# Altium PCB PCB_Master_Screen_V2.01.PcbDoc
Units mm, origin at the board's own origin, x right, y up, seen from the top; angles counter-clockwise.
Board outline 116.97 x 59.18 mm, 2 copper layers (Top Layer, Bottom Layer), stack 1.571 mm thick; 51 components, 38 nets, 228 pads, 210 vias.
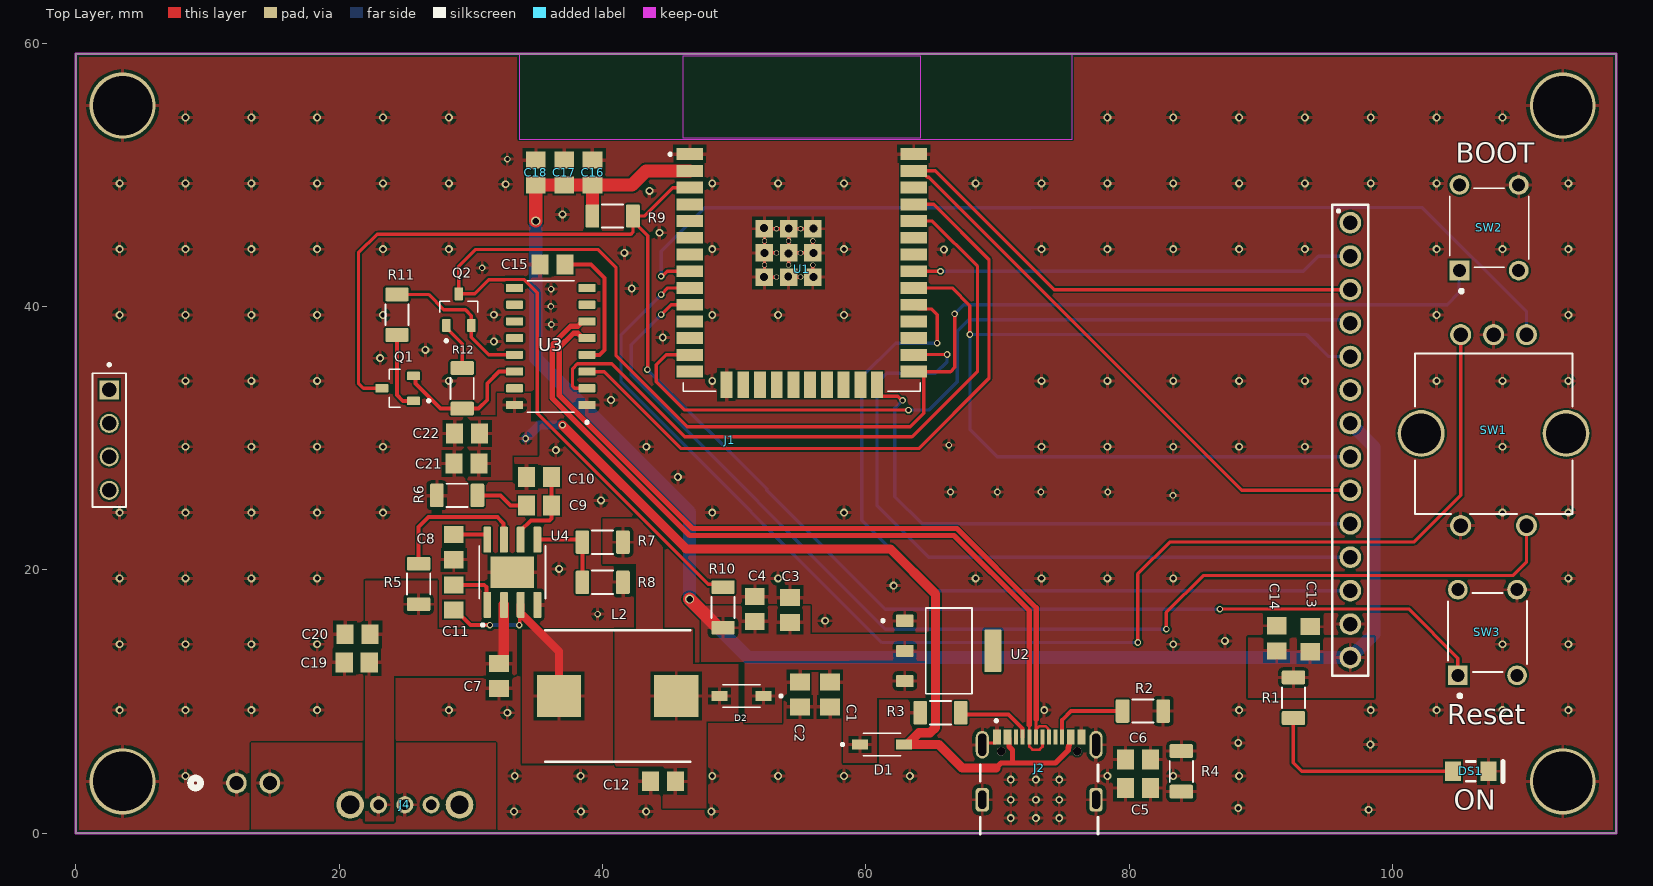
[diagram p0: Top Layer view]
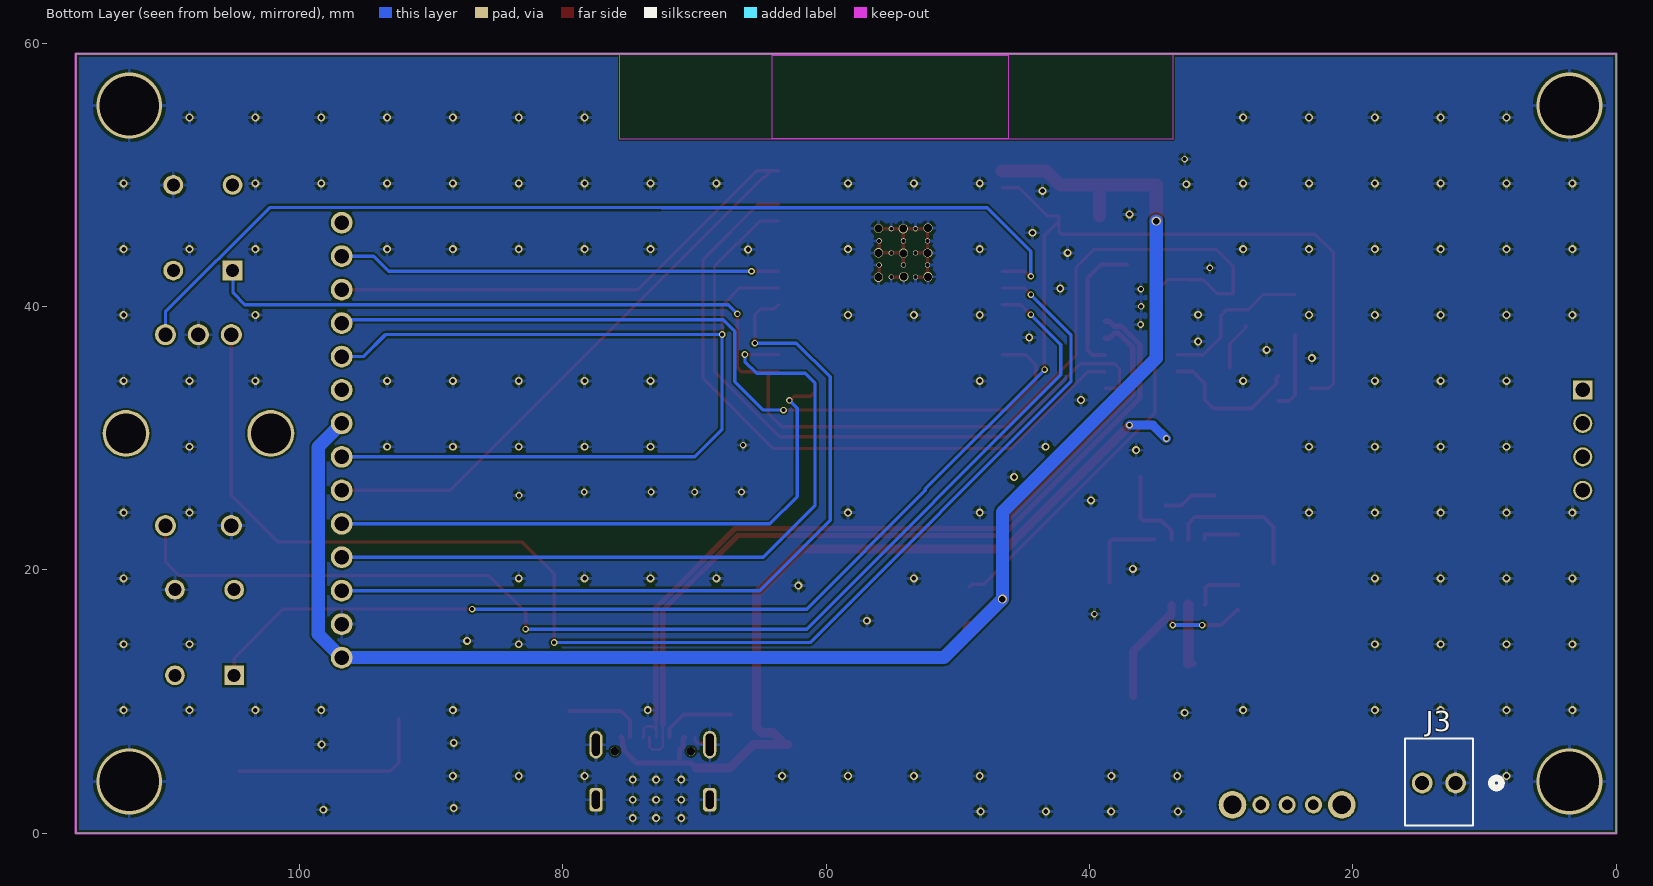
[diagram p1: Bottom Layer view, seen from below]
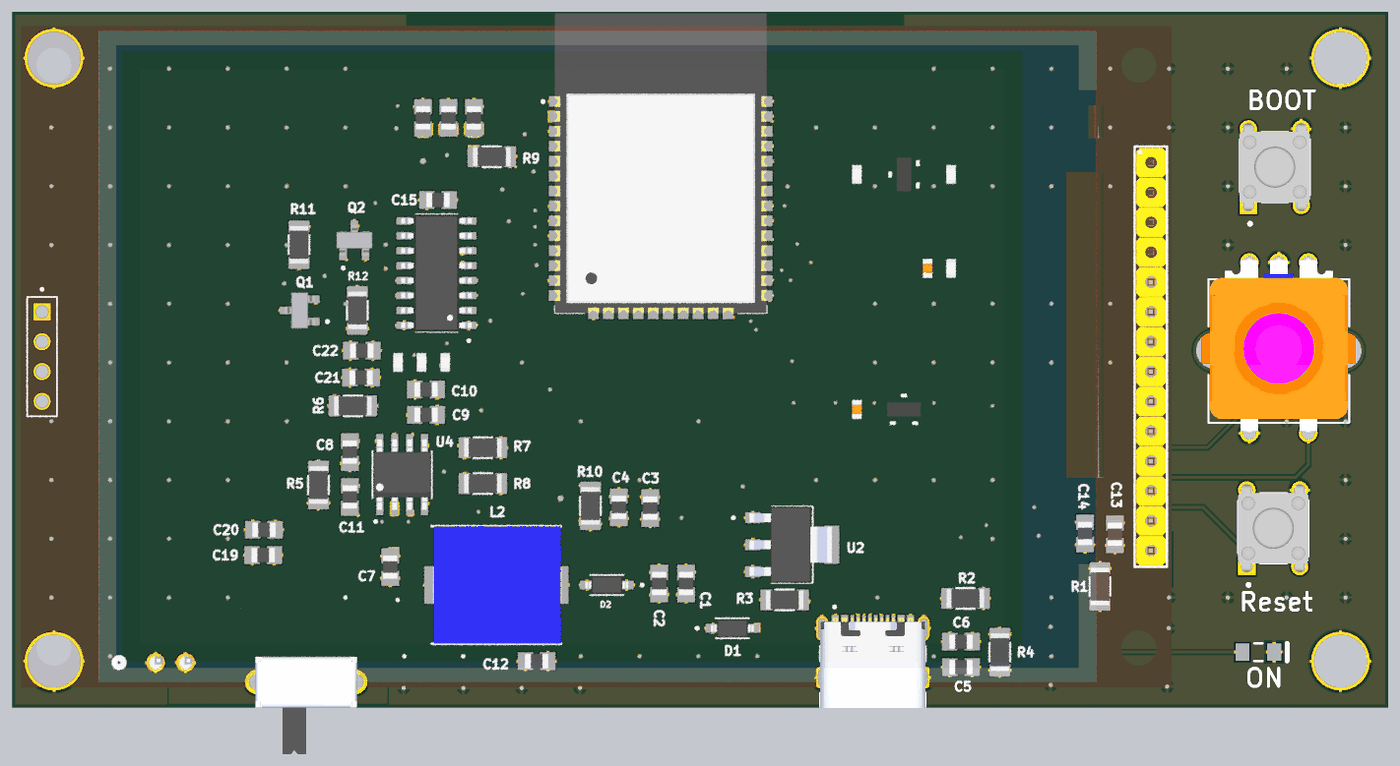
[diagram p2: 3D render of the assembled board from above, using the file's embedded part models]

## Layer stack, top to bottom
Top Solder: solder mask 0.0102, Solder Resist, Dk 3.5
Top Layer: signal copper 0.0356
Dielectric 1: dielectric 1.5, FR-4, Dk 4.8
Bottom Layer: signal copper 0.0356
Bottom Solder: solder mask 0.0102, Solder Resist, Dk 3.5

## Board outline
0,0 116.967,0 116.967,59.182 0,59.182

## Design rules (kind name [scope] priority, off if disabled: settings)
Clearance Clearance_Difpair [InNetClass('USBC')] p1: gap=0.1 ignorepadtopadclearanceinfootprint=FALSE
Clearance Clearance_USBC [InComponent('J2')] p2: gap=0.15 ignorepadtopadclearanceinfootprint=FALSE
Clearance [All] p3: gap=0.15 ignorepadtopadclearanceinfootprint=FALSE
DiffPairsRouting [InDifferentialPairClass('USB_TypeC')] p1: maxlimit=0.127 minlimit=0.127 mostfreqgap=0.127 toplayer_minwidth=0.404 toplayer_maxwidth=0.404 toplayer_prefwidth=0.404 bottomlayer_minwidth=0.404 bottomlayer_maxwidth=0.404 bottomlayer_prefwidth=0.404 impedanceprofiledriven=TRUE impedanceprofileid={651910EB-9BAB-48E1-8D11-BE1311B63662} impedanceprofilevalue=90.000000 maxuncoupledlength=12.7
HoleSize [All] p1: absolutevalues=TRUE maxlimit=6.3 minlimit=0.3 maxpercent=80.000 minpercent=20.000
MinimumSolderMaskSliver [InComponent('U4')] p1: minsoldermaskwidth=0.05
MinimumSolderMaskSliver MinimumSolderMaskSliver_1 [All] p2: minsoldermaskwidth=0.1
PolygonConnect [All] p1: connectstyle=Relief reliefconductorwidth=0.254 reliefentries=4 polygonreliefangle="90 Angle" airgapwidth=0.254
ReturnPath [All] p1: impedanceprofileid={651910EB-9BAB-48E1-8D11-BE1311B63662} _gaplimit=0
RoutingVias [All] p1: holewidth=0.3 width=0.5 viastyle="Through Hole" minholewidth=0.3 minwidth=0.4 maxholewidth=6.3 maxwidth=7
SilkToSolderMaskClearance SilkToSolderMaskClearance_R [HasFootprint('RES1206')] p1: minsilkscreentomaskgap=0.05 clearancetoexposedcopper=TRUE
SilkToSolderMaskClearance [IsPad] p2: minsilkscreentomaskgap=0.2 clearancetoexposedcopper=TRUE
SolderMaskExpansion [All] p1: expansion=0.102 istentingtop=FALSE
SupplyNets "Schematic Supply Nets_4" [InNet('VIN')] p1: voltage=0.000
SupplyNets "Schematic Supply Nets_3" [InNet('5V0')] p2: voltage=0.000
SupplyNets "Schematic Supply Nets_2" [InNet('VBAT')] p3: voltage=0.000
SupplyNets "Schematic Supply Nets_1" [InNet('GND')] p4: voltage=0.000
SupplyNets "Schematic Supply Nets" [InNet('3V3')] p5: voltage=0.000
Width Width_USB [InNetClass('USBC')] p1: maxlimit=0.254 minlimit=0.254 preferedwidth=0.254
Width Width_Pwr [InNet('3V3') OR InNet('5V0') OR InNet('VBAT')] p2: maxlimit=2 minlimit=0.5 preferedwidth=1.2 minimp=50.000000 maximp=50.000000 favimp=50.000000
Width Width_1 [All] p3: maxlimit=1.5 minlimit=0.2 preferedwidth=0.254 minimp=50.000000 maximp=50.000000 favimp=50.000000
26 further rules are at their usual default settings.

## Classes and differential pairs
net class USBC: D_N D_P
differential pair class USB_TypeC: D
differential pair D: +D_P -D_N

## Components (designator, comment, footprint, x,y, rotation, side; value= is the part's Value field where it differs from the comment)
C1 "10uF" CAP0805 57.277,10.541 r90 top value=805
C2 "100nF" CAP0805 54.991,10.541 r90 top value=805
C3 "22uF" CAP0805 54.229,16.957 r90 top value=805
C4 "100nF" CAP0805 51.562,17.018 r90 top value=805
C5 "100nF" CAP0805 80.645,3.429 r0 top value=805
C6 "1nF" CAP0805 80.645,5.588 r180 top value=805
C7 "4.7uF" CAP0805 32.131,11.938 r90 top value=805
C8 "0.1uF" CAP0805 28.702,21.717 r90 top value=805
C9 "6.8nF" CAP0805 35.179,24.892 r0 top value=805
C10 "0.1nF" CAP0805 35.179,27.051 r0 top value=805
C11 "10nF" CAP0805 28.702,17.907 r270 top value=805
C12 "10uF" CAP0805 44.577,3.937 r0 top value=805
C13 "100nF" CAP0805 93.726,14.732 r270 top value=805
C14 "10uF" CAP0805 91.186,14.798 r270 top value=805
C15 "100nF" CAP0805 36.195,43.18 r180 top value=805
C16 "47uF" CAP0805 39.243,50.165 r90 top value=805
C17 "22uF" CAP0805 37.084,50.165 r90 top value=805
C18 "100nF" CAP0805 34.925,50.165 r90 top value=805
C19 "47uF" CAP0805 21.336,12.954 r0 top value=805
C20 "100nF" CAP0805 21.402,15.113 r0 top value=805
C21 "100nF" CAP0805 29.657,28.067 r180 top value=805
C22 "4.7uF" CAP0805 29.718,30.353 r180 top value=805
D1 "1N5819HW-7-F" SOD3715X145N 61.214,6.731 r0 top value="Vf = 450 mV"
D2 "1N5819HW-7-F" SOD3715X145N 50.546,10.414 r180 top value="Vf = 450 mV"
DS1 "Red LED" LUMX-SML-LX1206IC_V 105.918,4.699 r0 top
J1 "TFT_3.5_INCH" 61301411121 96.774,29.845 r270 top locked value="3.5-inch TFT LCD (320 × 480)"
J2 "USB Type C 16P" GCT_USB4105-GF-A-060 73.152,2.54 r0 top value="16 Pin"
J3 "Battery Connector" CONN_A-6373-02A_MOL 12.192,3.81 r0 bottom value="2POS 2.54MM"
J4 "SK12D07VG4" SK12D07VG4 24.987,2.159 r0 top value="0.3A @ 30 VDC"
L2 "10uH" INDPM110100X400N 41.148,10.414 r0 top value="11 mm x 10 mm"
Q1 "MMBT3904" TRANS_MMBT3904 24.441,33.782 r180 top value=NPN
Q2 "MMBT3904" TRANS_MMBT3904 29.083,39.751 r90 top value=NPN
R1 "1K" RES1206 92.456,10.287 r270 top value=1206
R2 "5.1K" RES1206 81.026,9.271 r180 top value=1206
R3 "5.1K" RES1206 65.659,9.144 r0 top value=1206
R4 "1M" RES1206 83.947,4.699 r90 top value=1206
R5 "100K" RES1206 26.035,18.923 r270 top value=1206
R6 "6.8K" RES1206 28.956,25.654 r0 top value=1206
R7 "44.2K" RES1206 40.005,22.098 r0 top value=1206
R8 "10K" RES1206 40.005,19.05 r180 top value=1206
R9 "10K" RES1206 40.767,46.863 r180 top value=1206
R10 "10K" RES1206 49.149,17.145 r270 top value=1206
R11 "10K" RES1206 24.384,39.37 r90 top value=1206
R12 "10K" RES1206 29.337,33.782 r90 top value=1206
SW1 "EC11E15244G1" EC11E15244G1_AAL 110.157,37.853 r180 top value="10mA 5V DC"
SW2 "2-1825910-7" SW_2-1825910-7 107.315,45.974 r90 top value="Button 6mm"
SW3 "2-1825910-7" SW_2-1825910-7 107.188,15.24 r90 top value="Button 6mm"
U1 "ESP32-WROOM-32" MODULE_ESP32-WROOM-32 55.127,46.302 r0 top value="Dual Core, Wi-Fi, BLE"
U2 "AMS1117-3.3" SOT229P700X180-4N 66.294,13.843 r0 top value="0.8A, 15V"
U3 "CH340C" SOIC127P600X180-16N 36.068,36.957 r180 top value="USB to serial chip"
U4 "MP1484EN-LF" SOIC127P600X170-9N 33.147,19.812 r90 top value="0.925V 1 Output 3A"

## Footprints (in the part's own frame and the unit in brackets; to place one, negate y for a bottom-side part, rotate by r counter-clockwise, add the part's x,y. Pads: shape width x height; smd on the part's side, far side on the other; paste and mask are expansions set on the pad)
61301411121 [mm]
  round 1.65 hole 1.1: 1(-16.51,0) 2(-13.97,0) 3(-11.43,0) 4(-8.89,0) 5(-6.35,0) 6(-3.81,0) 7(-1.27,0) 8(1.27,0) 9(3.81,0) 10(6.35,0) 11(8.89,0) 12(11.43,0) 13(13.97,0) 14(16.51,0)
  rect 1.45x1.45 / inner round 1.45 / far side rect 1.45x1.45 hole 1.1: 01(-3.81,-94.234)
  round 1.45 hole 1.1: 02(-1.27,-94.234) 03(1.27,-94.234) 04(3.81,-94.234)
  silkscreen extent -17.88,-95.5 17.88,1.37, body extent -28.15,-96.02 28.15,1.78, height 4.4
CAP0805 [mm]
  rect 1.3x1.5 smd: 1(-0.95,0) 2(0.95,0)
  body extent -1,-0.63 1,0.63, height 0.7
CONN_A-6373-02A_MOL [mil]
  round 62 hole 42: 1(0,0) 2(100,0)
  silkscreen extent -137,-133 152,127, body extent -37,-135 157,115, height 420
EC11E15244G1_AAL [mil]
  round 140 / inner round 60 / far side round 140 hole 120 paste-99999 mask-70: 6(-118.11,295.28) 7(314.96,295.28)
  round 63 / inner round 60 / far side round 63 hole 43: A(0,0) B(196.85,0) C(98.43,0) E(196.85,570.87)
  round 63 hole 43: D(0,570.87)
  silkscreen extent -137,55 334,536, body extent -159,-16 356,572, height 965
GCT_USB4105-GF-A-060 [mm]
  rect 0.6x1.15 smd: A1(-3.2,4.755) A4(-2.4,4.755) B1(3.2,4.755) B4(2.4,4.755)
  rect 0.3x1.15 smd: A5(-1.25,4.755) A6(-0.25,4.755) A7(0.25,4.755) A8(1.25,4.755) B5(1.75,4.755) B6(0.75,4.755) B7(-0.75,4.755) B8(-1.75,4.755)
  oval 1x2.1 hole 0.6 slot 1.7 at 90 deg: SH1(-4.32,4.18) SH2(4.32,4.18)
  rrect50% 1x1.8 hole 0.6 slot 1.4 at 90 deg: SH3(-4.32,0) SH4(4.32,0)
  round 0.65 hole 0.65 unplated: ""(-2.89,3.68) ""(2.89,3.68)
  silkscreen extent -4.47,-2.6 4.47,6.1, body extent -4.47,-2.6 4.47,5.11, height 3.31
INDPM110100X400N [mm]
  rect 3.35x3.2 smd: 1(-4.45,0) 2(4.45,0)
  silkscreen extent -5.5,-5 5.5,5, body extent -5.41,-5 5.59,5, height 4
LUMX-SML-LX1206IC_V [mm] "SMD, 2-Leads, Body 3.2x1.5mm"
  rect 1.2x1.5 smd: 1(-1.35,0) 2(1.35,0)
  silkscreen extent -0.35,-0.75 2.45,0.75, body extent -1.6,-0.8 1.6,0.8, height 1.1
MODULE_ESP32-WROOM-32 [mm]
  rect 2x0.9 smd: 1(-8.5,5.26) 2(-8.5,3.99) 3(-8.5,2.72) 4(-8.5,1.45) 5(-8.5,0.18) 6(-8.5,-1.09) 7(-8.5,-2.36) 8(-8.5,-3.63) 9(-8.5,-4.9) 10(-8.5,-6.17) 11(-8.5,-7.44) 12(-8.5,-8.71) 13(-8.5,-9.98) 14(-8.5,-11.25) 25(8.5,-11.25) 26(8.5,-9.98) 27(8.5,-8.71) 28(8.5,-7.44) 29(8.5,-6.17) 30(8.5,-4.9) 31(8.5,-3.63) 32(8.5,-2.36) 33(8.5,-1.09) 34(8.5,0.18) 35(8.5,1.45) 36(8.5,2.72) 37(8.5,3.99) 38(8.5,5.26)
  rect 0.9x2 smd: 15(-5.715,-12.25) 16(-4.445,-12.25) 17(-3.175,-12.25) 18(-1.905,-12.25) 19(-0.635,-12.25) 20(0.635,-12.25) 21(1.905,-12.25) 22(3.175,-12.25) 23(4.445,-12.25) 24(5.715,-12.25)
  rect 1.33x1.33 smd: 39(-2.835,-4.075) 39(-2.835,-2.24) 39(-2.835,-0.405) 39(-1,-4.075) 39(-1,-2.24) 39(-1,-0.405) 39(0.835,-4.075) 39(0.835,-2.24) 39(0.835,-0.405)
  round 0.4 hole 0.3: 39(-2.835,-3.157) 39(-2.835,-1.322) 39(-1.917,-4.075) 39(-1.917,-2.24) 39(-1.917,-0.405) 39(-1,-3.157) 39(-1,-1.322) 39(-0.082,-4.075) 39(-0.082,-2.24) 39(-0.082,-0.405) 39(0.835,-3.157) 39(0.835,-1.322)
  Keep-Out Layer region: 9,6.45 -9,6.45 -9,12.75 9,12.75
  Keep-Out Layer region: 9,6.45 -9,6.45 -9,12.75 9,12.75
  silkscreen extent -10.1,-12.75 9,5.35, body extent -9,-12.75 9,12.75, height 3.2
RES1206 [mm] "Resistor, Chip; 3.20 mm L X 1.60 mm W X 0.65 mm H body (Case Code: 3216 mm / 1206 mil; Package: SAMSUNGEM RC3216; Tool: Library Expert Pro 19)"
  rrect19% 1.04x1.77 smd: 1(-1.54,0) 2(1.54,0)
  silkscreen extent -0.79,-0.88 0.79,0.88, body extent -1.6,-0.8 1.6,0.8, height 0.65
SK12D07VG4 [mm]
  round 1.308 hole 0.8: 1(-2,0) 2(2,0) COM(0,0)
  round 2.1 hole 1.4: M1(-4.15,0) M2(4.15,0)
  body extent -4.3,-6.15 4.3,2.15, height 4.7
SOD3715X145N [mm]
  rect 1.21x0.73 smd: A(1.68,0) C(-1.68,0)
  silkscreen extent -3.1,-0.85 1.43,0.85, body extent -1.83,-0.77 1.83,0.77, height 1.5
SOIC127P600X170-9N [mm]
  rrect25% 1.97x0.6 smd: 1(-2.475,1.905) 2(-2.475,0.635) 3(-2.475,-0.635) 4(-2.475,-1.905) 5(2.475,-1.905) 6(2.475,-0.635) 7(2.475,0.635) 8(2.475,1.905)
  rect 2.41x3.3 smd paste-3: 9(0,0)
  silkscreen extent -4.1,-2.52 2,2.52, body extent -3,-2.45 3,2.45, height 1.7
SOIC127P600X180-16N [mm]
  rrect25% 1.31x0.62 smd: 1(-2.75,4.445) 2(-2.75,3.175) 3(-2.75,1.905) 4(-2.75,0.635) 5(-2.75,-0.635) 6(-2.75,-1.905) 7(-2.75,-3.175) 8(-2.75,-4.445) 9(2.75,-4.445) 10(2.75,-3.175) 11(2.75,-1.905) 12(2.75,-0.635) 13(2.75,0.635) 14(2.75,1.905) 15(2.75,3.175) 16(2.75,4.445)
  silkscreen extent -2.85,-5 1.78,5.85, body extent -3,-5 3,5, height 1.8
SOT229P700X180-4N [mm]
  rrect15% 1.31x0.93 smd: 1(-3.345,2.29) 2(-3.345,0) 3(-3.345,-2.29)
  rrect15% 1.31x3.24 smd: 4(3.345,0)
  silkscreen extent -5.1,-3.25 1.75,3.25, body extent -3.63,-3.25 3.37,3.25, height 1.8
SW_2-1825910-7 [mm]
  rect 1.498x1.498 hole 0.99: 1(-3.25,2.25)
  round 1.498 hole 0.99: 2(3.25,2.25) 3(-3.25,-2.25) 4(3.25,-2.25)
  silkscreen extent -4.92,-3 3,3, body extent -3.9,-3 3.9,3, height 4.2
TRANS_MMBT3904 [mm]
  rrect25% 1x0.65 smd paste+0 mask+0.102: 1(-1.2,0.95) 2(-1.2,-0.95) 3(1.2,0)
  silkscreen extent -2.46,-1.45 0.65,1.45, body extent -1.3,-1.52 1.3,1.52, height 1.3

## Part data
C1 C2 C3 C4 C5 C6 C7 C8 C9 C10 C11 C12 C13 C14 C15 C16 C17 C18 C19 C20 C21 C22: library part "Capacitor 0805", "Capacitor 0805", Package="0805 Yageo", TempMax=125, TempMin=-55, Check_prices=https://www.snapeda.com/parts/CC0805KRX7R9BB104/Yageo/view-part/?ref=eda, Link=-, MF=Yageo, MP=CC0805KRX7R9BB104, Part Number="Capacitor 0805", PartID="Capacitor 0805", SnapEDA_Link=https://www.snapeda.com/parts/CC0805KRX7R9BB104/Yageo/view-part/?ref=snap
D1 D2: "Schottky Diodes & Rectifiers SOD-123", Package="SOD-123 Fairchild Semiconductor", TempMax=125, TempMin=-65, Availability="In Stock", Check_prices=https://www.snapeda.com/parts/1N5819HW-7-F/Diodes+Inc./view-part/?ref=eda, Link=https://4donline.ihs.com/images/VipMasterIC/IC/DIOD/DIOD-S-A0011437026/DIOD-S-A0011683586-1.pdf?hkey=CECEF36DEECDED6468708AAF2E19C0C6, MF="Diodes Inc.", MP=1N5819HW-7-F, Part Number=1N5819HW-7-F, PartID=1N5819HW-7-F, Price=None, Purchase-URL=https://pricing.snapeda.com/search/part/1N5819HW-7-F/?ref=eda, SnapEDA_Link=https://www.snapeda.com/parts/1N5819HW-7-F/Diodes+Inc./view-part/?ref=snap
DS1: library part CMP-2000-07123-1, "LED Red, 65 mW, -40 to 85 degC, 2-Pin SMD, RoHS, Tape and Reel", Color=Red, Manufacturer=Lumex, Operating Temperature=-25to85C, Package Description="2-Pin Surface Mount Device, Body 3.2 x 1.5 mm", Package Reference=SML-LX1206IC, Part No=SML-LX1206IC-TR, Reverse Voltage=5(Min)V, Supplier_Package=SMD, Datasheet URL=http://www.lumex.com/content/files/ProductAttachment/SML-LX1206IC-TR.pdf, Datasheet Version="Rev. J, 08/2012", Dimension=3.2x1.6x1.1mm, Dominant Wavelength=N/A, ECCN=EAR99, Family=SML-LX1206IC, HTS=8541402000, Intensity=6mcd, LED Material=GaAsP, Lens Appearance=ColorlessNonDiffused, Lens Dimensions=2x1.6x0.5mm, Manufacturer URL=http://www.lumexinstruments.com/, Mounting=SurfaceMount, Mounting Technology=SurfaceMount, Number of LEDs=1, Packaging=TapeandReel, Peak Wavelength=635nm, Pin_Count=2, RoHS=Unknown, Supplier=Lumex, Supplier Standard Pack=3,000, Type=Uni-Color, Viewing Angle=160
J1: library part TFT-ILI9488, "3.5-inch TFT LCD (320 × 480) with ILI9488 driver + XPT2046 resistive touch", Package=None, TempMax=85, TempMin=-30, Check_prices=https://www.snapeda.com/parts/61301411121/W%25C3%25BCrth+Elektronik+Midcom/view-part/?ref=eda, Link=https://grabcad.com/library/3-5-color-spi-display-based-on-ili9488-chip-1, MF="WÃ¼rth Elektronik", MP=61301411121, Part Number=TFT-ILI9488, PartID=TFT-ILI9488, SnapEDA_Link=https://www.snapeda.com/parts/61301411121/W%25C3%25BCrth+Elektronik+Midcom/view-part/?ref=snap
J2: library part USB4105-GF-A-060, "CONN RCP USB2.0 TYP C 16P SMD RA", Package=None, TempMax=85, TempMin=-40, Check_prices=https://www.snapeda.com/parts/USB4105GFA060/Global+Connector+Technology/view-part/?ref=eda, Link=https://gct.co/files/specs/usb4105-spec.pdf, MF="Global Connector Technology", MP=USB4105GFA060, Part Number=USB4105-GF-A-060, PartID=USB4105-GF-A-060, SnapEDA_Link=https://www.snapeda.com/parts/USB4105GFA060/Global+Connector+Technology/view-part/?ref=snap
J3: library part 22232021, "Connector Header Through Hole 2 position 0.100\" (2.54mm)", Package=None, TempMax=85, TempMin=-30, Check_prices=https://www.snapeda.com/parts/22232021/Molex/view-part/?ref=eda, Link=https://www.molex.com/en-us/products/part-detail/0022232021, MF=Molex, MP=22232021, Part Number=22232021, PartID=22232021, SnapEDA_Link=https://www.snapeda.com/parts/22232021/Molex/view-part/?ref=snap
J4: "Slide Switches - Side Knob", Package=None, TempMax=70, TempMin=-20, Check_prices=https://www.snapeda.com/parts/SK12D07VG4/C%2526K/view-part/?ref=eda, Link=https://www.snapeda.com/parts/SK12D07VG4/C&K/datasheet/, MF=C&K, MP=SK12D07VG4, Part Number=SK12D07VG4, PartID=SK12D07VG4, SnapEDA_Link=https://www.snapeda.com/parts/SK12D07VG4/C%2526K/view-part/?ref=snap
L2: library part SRP1038AA-R36M, "SMD Inductor 11x10mm", Manufacturer_Name=Bourns, Mouser Part Number=652-SRP1038AA-R36M, TempMax=155, TempMin=-55, Datasheet Link=https://www.bourns.com/docs/product-datasheets/srp1038aa.pdf?sfvrsn=2d1249f6_4, Geometry.Height=4mm, Link=https://gct.co/files/specs/usb4105-spec.pdf, Manufacturer_Part_Number=SRP1038AA-R36M, Mouser Price/Stock=https://www.mouser.co.uk/ProductDetail/Bourns/SRP1038AA-R36M?qs=CiayqK2gdcJABH4%252B3%252B0pzQ%3D%3D, Part Number=SRP1038AA-R36M, PartID=SRP1038AA-R36M
Q1 Q2: "TRANS NPN 40V 0.2A SOT23-3", Package="SOT-23 Diotec", TempMax=150, TempMin=-55, Check_prices=https://www.snapeda.com/parts/MMBT3904/Diotec/view-part/?ref=eda, Link=https://diotec.com/request/datasheet/mmbt3904.pdf, MF="Diotec Semiconductor", MP=MMBT3904, Part Number=MMBT3904, PartID=MMBT3904, SnapEDA_Link=https://www.snapeda.com/parts/MMBT3904/Diotec/view-part/?ref=snap
R1 R2 R3 R4 R5 R6 R7 R8 R9 R10 R11 R12: library part "Resistor 1206", "Resistor 1206", TempMax=125, TempMin=-55, Link=-, Part Number="Resistor 1206", PartID="Resistor 1206"
SW1: "EC11 Rotary Encoder with Switch", Manufacturer_Name="Alps Electric", TempMax=85, TempMin=-40, Copyright="Copyright (C) 2025 Ultra Librarian. All rights reserved.", Link=https://tech.alpsalpine.com/e/products/detail/EC11E15244G1/, Manufacturer_Part_Number=EC11E15244G1, Part Number=EC11E15244G1, PartID=EC11E15244G1, RefDes=RefDes, Type=Encoders
SW2 SW3: library part SW_2-1825910-7, "Button 6mm x 6mm", Package=None, TempMax=150, TempMin=-55, Availability=Unavailable, EU_RoHS_Compliance=Compliant, Link=https://www.digikey.de/de/products/detail/te-connectivity-alcoswitch-switches/2-1825910-7/1632528?srsltid=AfmBOorIgxPx8-RK9ZbRgtQifCi0fztvshC0t_fVXu46lzstz4pRWn6z, MF="TE Connectivity", MP=2-1825910-7, Part Number=SW_2-1825910-7, PartID=SW_2-1825910-7, Price=None, SnapEDA_Link=https://www.snapeda.com/parts/2-1825910-7/TE%20Connectivity%20ALCOSWITCH%20Switches/view-part/498898/?ref=snap, TE_purchase_URL=https://www.te.com/usa-en/product-2-1825910-7.html?te_bu=Cor&te_type=disp&te_campaign=seda_glo_cor-seda-global-disp-prtnr-fy19-seda-model-bom-cta_sma-317_1&elqCampaignId=32493
U1: "Bluetooth, WiFi 802.11b/g/n, Bluetooth v4.2 +EDR, Class 1, 2 and 3 Transceiver Module U.FL Surface Mount", Package="Module Espressif Systems", TempMax=85, TempMin=-40, Availability="In Stock", Check_prices=https://www.snapeda.com/parts/ESP32-WROOM-32/Espressif+Systems/view-part/?ref=eda, Link=https://documentation.espressif.com/esp32-wroom-32_datasheet_en.pdf, MF="Espressif Systems", MP=ESP32-WROOM-32, Part Number=ESP32-WROOM-32, PartID=ESP32-WROOM-32, Price=None, Purchase-URL=https://pricing.snapeda.com/search/part/ESP32-WROOM-32/?ref=eda, SnapEDA_Link=https://www.snapeda.com/parts/ESP32-WROOM-32/Espressif+Systems/view-part/?ref=snap
U2: "Linearer Spannungsregler, 800 mA, 15 V", Package="SOT-223 Seeed Technology", TempMax=125, TempMin=-40, Check_prices=https://www.snapeda.com/parts/AMS1117-3.3/Advanced+Monolithic+Systems/view-part/?ref=eda, Link=https://www.snapeda.com/parts/AMS1117-3.3/Advanced%20Monolithic%20Systems/datasheet/, MF="Advanced Monolithic Systems", MP=AMS1117-3.3, Part Number=AMS1117-3.3, PartID=AMS1117-3.3, SnapEDA_Link=https://www.snapeda.com/parts/AMS1117-3.3/Advanced+Monolithic+Systems/view-part/?ref=snap
U3: "USB to serial chip", Package=None, TempMax=85, TempMin=-30, Availability="Not in stock", Check_prices=https://www.snapeda.com/parts/CH340C/WCH/view-part/?ref=eda, Link=https://www.snapeda.com/parts/CH340C/WCH/datasheet/, MF=WCH, MP=CH340C, Part Number=CH340C, PartID=CH340C, Price=None, SnapEDA_Link=https://www.snapeda.com/parts/CH340C/WCH/view-part/?ref=snap
U4: "Buck Switching Regulator IC Positive Adjustable 0.925V 1 Output 3A 8-SOIC (0.154\", 3.90mm Width)", Package=None, TempMax=85, TempMin=-20, Availability=Unavailable, Link=https://www.digikey.at/de/products/detail/monolithic-power-systems-inc/MP1484EN-LF-Z/5291682?srsltid=AfmBOorvZqZweepwF19jqwdCHLwo1ck00ZSGZEtpVPLNX4bN2FRk_ecr, MP=MP1484EN-LF, Part Number=MP1484EN-LF, PartID=MP1484EN-LF, Price=None

## Via types
v1: diameter 0.6, hole 0.35, Top Layer to Bottom Layer, tented both sides, 165 vias
v2: diameter 0.5, hole 0.3, Top Layer to Bottom Layer, tented both sides, 30 vias
v3: diameter 0.7, hole 0.6, Top Layer to Bottom Layer, 9 vias
v4: diameter 5, hole 4.5, Top Layer to Bottom Layer, 4 vias
v5: diameter 0.7, hole 0.5, Top Layer to Bottom Layer, tented both sides, 2 vias

## Nets (pads, with @x,y where several pads share a name; then routed paths per layer and width w, separated by ;. In a path a pad name is that pad's centre, name@x,y a point inside that pad or via, vN(x,y) a via of type N, cw(c..) or ccw(c..) an arc to the next point about the centre after c; other vN are vias at no path point)
3V3: C3.1 C4.1 C13.2 C14.2 C16.1 C17.1 C18.1 J1.7 J1.14 R1.1 R9.2 R10.2 U1.2 U2.2 | length 125.5
  Top Layer w1: v5(34.925,46.482) C18.1 C17.1 C16.1 ; R9.2 39.235,46.871 39.235,49.207 C16.1 ; v5(46.609,17.78) 48.784,15.605 R10.2 ; U1.2 43.307,50.292 42.23,49.215 C16.1
  Bottom Layer w1: v5(34.925,46.482) 34.925,36.068 46.609,24.384 v5(46.609,17.78) 51.054,13.335 J1.14 98.552,15.113 98.552,29.337 J1.7
5V0: C1.2 C2.2 D1.C D2.C U2.3
CLK: J1.5 J1.8 U1.30 | length 73.5
  Top Layer w0.254: U1.30 66.548,41.402 67.887,40.063 67.887,37.874 v2(67.894,37.868)
  Bottom Layer w0.254: J1.8 69.977,28.575 67.894,30.658 v2(67.894,37.868) 93.45,37.868 95.123,36.195 J1.5
CS: J1.12 U1.29 | length 61.2
  Top Layer w0.254: U1.29 63.95,39.809 64.966,39.809 65.405,39.37 v2(65.405,37.211)
  Bottom Layer w0.254: v2(65.405,37.211) 62.254,37.211 59.69,34.647 59.69,23.749 65.024,18.415 J1.12
D/C: J1.10 U1.24 | length 45.7
  Top Layer w0.254: U1.24 60.842,33.502 61.165,33.179 62.403,33.179 62.718,32.864 v2(62.785,32.864)
  Bottom Layer w0.254: v2(62.785,32.864) 62.193,32.272 62.193,25.564 64.262,23.495 J1.10
D_N: J2.A7 J2.B7 U3.6 | length 62.6
  Top Layer w0.2: 72.402,8.232 J2.B7 72.402,6.572 72.628,6.346 73.176,6.346 73.402,6.572 J2.A7
  Top Layer w0.404: U3.6 38.473,38.862 38.365,38.754 38.365,38.729 38.128,38.493 37.574,38.493 36.172,37.091 36.172,33.043 46.609,22.606 66.686,22.606 72.402,16.89 72.402,8.232
D_P: J2.A6 J2.B6 U3.5 | length 60.8
  Top Layer w0.2: J2.A6 72.902,7.874 ; 72.914,7.886 73.148,8.12 73.656,8.12 73.852,7.924 73.852,7.345 J2.B6 ; 72.916,7.887 72.916,8.619 72.933,8.636
  Top Layer w0.404: U3.5 38.473,37.592 38.365,37.7 38.365,37.725 38.128,37.961 37.794,37.961 36.703,36.871 36.703,33.263 46.829,23.137 66.906,23.137 72.933,17.11 72.933,8.636
EN: Q1.3 R9.1 SW3.1 U1.3 | length 123.5
  Top Layer w0.254: Q1.3 21.844,33.782 21.463,34.163 21.463,44.069 22.876,45.482 42.158,45.482 42.307,45.631 R9.1@42.307,46.498 ; v2(43.404,35.198) 43.434,35.228 43.434,45.371 R9.1@42.307,46.498 ; U1.3 45.339,49.022 43.18,46.863 R9.1 R9.1@42.307,46.498 ; v2(86.868,17.018) 86.877,17.027 101.21,17.027 104.938,13.299 SW3.1
  Bottom Layer w0.254: v2(43.404,35.198) 52.459,26.142 52.459,26.027 61.468,17.018 v2(86.868,17.018)
GND: C1.1 C2.1 C3.2 C4.2 C5.1 C5.2 C6.1 C6.2 C7.1 C8.1 C10.1 C12.1 C13.1 C14.1 C15.2 C16.2 C17.2 C18.2 C19.1 C20.1 C21.2 C22.2 DS1.2 J1.13 J2.A1 J2.B1 J2.SH1 J2.SH2 J2.SH3 J2.SH4 J3.1 R2.1 R3.1 R4.1 R4.2 R6.1 R8.1 SW1.C SW1.E SW2.4 SW3.4 U1.1 U1.15 U1.38 U1.39 U2.1 U3.1 U4.4 U4.9 | length 18.3
  Top Layer w0.254: v3(52.248,45.951) 52.302,45.897 53.209,45.897 U1.39@54.128,45.897 ; v3(52.25,42.247) 52.292,42.289 52.292,43.145 52.292,44.038 v3(52.281,44.049) 52.294,44.062 U1.39@53.209,44.062 ; U1.39@52.27,42.227 U1.39@53.209,42.227 ; U1.39@52.292,44.06 52.292,44.98 U1.39@52.292,45.907 ; v3(54.095,42.26) 54.127,42.227 U1.39@55.045,42.227 ; U1.39@54.127,43.145 54.127,44.027 v3(54.124,44.03) 54.127,44.033 54.127,44.98 U1.39@54.127,45.896 ; v3(54.133,45.902) 54.138,45.897 55.045,45.897 55.981,45.897 v3(56.01,45.926) ; U1.39@54.156,44.062 55.045,44.062 56.014,44.062 v3(56.02,44.068) 55.962,44.126 U1.39@55.962,44.98 ; U1.39@55.962,43.145 55.962,42.268 v3(56.007,42.223) ; J2.SH1 68.959,6.847 69.779,6.847 69.952,7.02 J2.A1
  other v1: 70.993,1.143 72.898,1.143 74.676,1.143 33.274,1.651 38.354,1.651 43.307,1.651 48.26,1.651 98.171,1.778 88.265,1.905 70.993,2.54 72.898,2.54 74.676,2.54 70.993,4.064 72.898,4.064 74.676,4.064 8.33,4.346 33.33,4.346 38.33,4.346 48.33,4.346 53.33,4.346 58.33,4.346 63.33,4.346 78.33,4.346 83.33,4.346 88.33,4.346 98.298,6.731 88.265,6.858 32.766,9.144 3.33,9.346 8.33,9.346 13.33,9.346 18.33,9.346 28.33,9.346 73.535,9.346 88.33,9.346 98.33,9.346 103.33,9.346 108.33,9.346 113.33,9.346 3.33,14.346 8.33,14.346 13.33,14.346 18.33,14.346 83.33,14.346 108.33,14.346 113.33,14.346 87.249,14.605 56.896,16.129 62.103,18.796 3.33,19.346 8.33,19.346 13.33,19.346 18.33,19.346 53.33,19.346 68.33,19.346 73.33,19.346 78.33,19.346 83.33,19.346 113.33,19.346 36.703,20.066 3.33,24.346 8.33,24.346 13.33,24.346 18.33,24.346 23.33,24.346 48.33,24.346 58.33,24.346 108.33,24.346 113.33,24.346 39.878,25.273 45.72,27.051 36.449,29.083 8.33,29.346 13.33,29.346 18.33,29.346 23.33,29.346 43.33,29.346 73.33,29.346 78.33,29.346 83.33,29.346 88.33,29.346 93.33,29.346 108.33,29.346 40.64,32.893 8.33,34.346 13.33,34.346 18.33,34.346 28.33,34.346 48.33,34.346 73.33,34.346 78.33,34.346 83.33,34.346 88.33,34.346 93.33,34.346 103.33,34.346 108.33,34.346 113.33,34.346 23.114,36.068 26.543,36.703 31.75,37.338 44.567,37.637 3.33,39.346 8.33,39.346 13.33,39.346 18.33,39.346 23.33,39.346 48.33,39.346 53.33,39.346 58.33,39.346 103.33,39.346 113.33,39.346 31.75,39.37 42.216,41.363 41.656,44.069 65.913,44.323 3.33,44.346 8.33,44.346 13.33,44.346 18.33,44.346 23.33,44.346 28.33,44.346 48.33,44.346 58.33,44.346 73.33,44.346 78.33,44.346 83.33,44.346 88.33,44.346 93.33,44.346 103.33,44.346 108.33,44.346 113.33,44.346 44.323,45.593 36.957,46.99 43.561,48.768 32.639,49.276 3.33,49.346 8.33,49.346 13.33,49.346 18.33,49.346 23.33,49.346 28.33,49.346 48.33,49.346 53.33,49.346 58.33,49.346 68.33,49.346 73.33,49.346 78.33,49.346 83.33,49.346 88.33,49.346 93.33,49.346 98.33,49.346 103.33,49.346 113.33,49.346 8.33,54.346 13.33,54.346 18.33,54.346 23.33,54.346 28.33,54.346 78.33,54.346 83.33,54.346 88.33,54.346 93.33,54.346 98.33,54.346 103.33,54.346 108.33,54.346
  other v2: 39.624,16.637 83.312,25.654 66.421,25.908 69.977,25.908 73.279,25.908 78.359,25.908 66.294,29.464 36.115,38.627 36.068,40.005 36.093,41.318 30.861,42.926 32.766,51.181
  other v4: 3.556,3.937 112.903,3.937 3.556,55.245 112.903,55.245
IO0: Q2.3 R10.1 SW2.1 U1.25 | length 135.1
  Top Layer w0.254: R10.1 48.937,18.897 48.032,18.897 35.052,31.877 35.052,41.05 34.063,42.039 32.573,42.039 32.571,42.037 31.369,42.037 30.283,40.951 Q2.3 29.083,43.053 30.353,44.323 39.624,44.323 41.021,42.926 41.021,36.258 46.418,30.861 63.373,30.861 64.389,31.877 64.389,34.729 64.066,35.052 U1.25 66.421,35.052 66.735,35.366 v2(66.735,39.437)
  Bottom Layer w0.254: v2(66.735,39.437) 67.421,40.123 104.131,40.123 105.029,41.021 105.029,42.688 SW2.1
IO25: SW1.D U1.10 | length 89.6
  Top Layer w0.254: v2(44.45,39.37) 45.212,40.132 U1.10 ; v2(82.804,15.494) 82.804,16.764 85.607,19.567 109.102,19.567 110.157,20.622 SW1.D
  Bottom Layer w0.254: v2(44.45,39.37) 42.164,37.084 42.164,34.798 61.468,15.494 v2(82.804,15.494)
IO32: SW1.A U1.8 | length 76.3
  Top Layer w0.254: v2(44.45,42.291) 44.517,42.291 44.898,42.672 U1.8
  Bottom Layer w0.254: v2(44.45,42.291) 44.45,44.196 47.752,47.498 72.497,47.498 72.506,47.507 102.242,47.507 110.157,39.592 SW1.A
IO33: SW1.B U1.9 | length 102.1
  Top Layer w0.254: v2(44.45,40.894) 44.958,41.402 U1.9 ; v2(80.645,14.478) 80.645,19.685 83.067,22.107 101.609,22.107 105.157,25.655 SW1.B
  Bottom Layer w0.254: v2(44.45,40.894) 41.402,37.846 41.402,34.29 61.214,14.478 v2(80.645,14.478)
MISO: J1.2 U1.31 | length 33.6
  Top Layer w0.254: U1.31 v2(65.659,42.672)
  Bottom Layer w0.254: v2(65.659,42.672) 93.218,42.672 94.361,43.815 J1.2
MOSI: J1.3 J1.9 U1.37 | length 80.1
  Top Layer w0.254: J1.9 88.526,26.035 64.762,49.799 64.67,49.799 64.177,50.292 U1.37 65.278,50.292 74.295,41.275 J1.3
NetC8_2: C8.2 U4.8 | length 2.9
  Top Layer w0.3: C8.2 31.242,22.667 U4.8
NetC9_1: C9.1 R6.2 | length 4
  Top Layer w0.3: R6.2 32.258,25.654 33.02,24.892 C9.1
NetC9_2: C9.2 C10.2 U4.6 | length 6.6
  Top Layer w0.3: U4.6 33.782,22.972 34.559,23.749 35.98,23.749 36.129,23.898 C9.2 C10.2
NetC11_1: C11.1 U4.1 | length 3.9
  Top Layer w0.3: C11.1 31.009,18.857 31.185,18.681 31.185,17.394 U4.1
NetC11_2: C11.2 L2.1 U4.3 | length 15.3
  Top Layer w0.254: U4.3@33.609,16.652 33.609,17.164 U4.3 ; v2(33.672,15.801) 33.719,15.848 33.719,16.599 U4.3@33.769,16.65
  Top Layer w0.3: C11.2 28.802,16.957 29.958,15.801 v2(31.436,15.801)
  Top Layer w0.6: U4.3 33.782,16.652 33.848,16.652 36.698,13.802 L2.1
  Bottom Layer w0.3: v2(31.436,15.801) v2(33.672,15.801)
NetC12_2: C12.2 D2.A L2.2 R7.2
NetC15_1: C15.1 U3.4 | length 10.3
  Top Layer w0.3: C15.1 39.116,43.18 40.132,42.164 40.132,36.703 39.751,36.322 U3.4
NetDS1_1: DS1.1 R1.2 | length 15.8
  Top Layer w0.254: R1.2 92.456,5.334 93.091,4.699 DS1.1
NetJ2_A5: J2.A5 R3.2 | length 5.8
  Top Layer w0.3: R3.2@67.199,9.017 70.829,9.017 71.902,7.944 J2.A5
NetJ2_B5: J2.B5 R2.2 | length 6.2
  Top Layer w0.3: J2.B5 74.902,8.608 75.565,9.271 R2.2
NetJ3_2: J3.2 J4.COM
NetQ1_1: Q1.1 R11.1 | length 6
  Top Layer w0.3: R11.1 24.384,33.274 24.826,32.832 Q1.1
NetQ1_2: Q1.2 R12.1 U3.14 | length 10.9
  Top Layer w0.3: Q1.2 25.811,34.562 25.811,34.133 27.702,32.242 R12.1 30.591,32.242 31.242,32.893 31.242,34.163 32.131,35.052 U3.14
NetQ2_1: Q2.1 R12.2 | length 3.7
  Top Layer w0.254: Q2.1 28.133,38.376 29.337,37.172 R12.2
NetQ2_2: Q2.2 R11.2 U3.13 | length 11.8
  Top Layer w0.254: R11.2 26.787,40.91 27.946,39.751 29.591,39.751 30.033,39.309 Q2.2 30.033,37.658 31.369,36.322 U3.13
NetR5_1: R5.1 U4.7 | length 11
  Top Layer w0.3: R5.1 26.035,23.241 26.797,24.003 32.004,24.003 32.477,23.53 32.477,22.322 U4.7
NetR7_1: R7.1 R8.2 U4.5 | length 6.5
  Top Layer w0.3: U4.5 38.276,22.287 R7.1 R8.2
RESET: J1.11 U1.26 | length 55.9
  Top Layer w0.254: U1.26 63.653,36.348 v2(66.158,36.348)
  Bottom Layer w0.254: v2(66.158,36.348) 66.158,35.805 65.269,34.916 61.586,34.916 60.833,34.163 60.833,24.892 64.77,20.955 J1.11
RXD: U1.35 U3.3 | length 51.6
  Top Layer w0.254: U3.3 40.132,35.052 45.974,29.21 64.008,29.21 69.342,34.544 69.342,43.561 65.151,47.752 U1.35
T_CS: J1.4 U1.13 | length 62.9
  Top Layer w0.254: U1.13 44.831,36.322 44.069,35.56 44.069,34.29 46.229,32.13 v2(63.232,32.13)
  Bottom Layer w0.254: v2(63.232,32.13) 64.77,32.131 66.929,34.29 66.929,38.1 67.818,38.989 96.52,38.989 J1.4
TXD: U1.34 U3.2 | length 52
  Top Layer w0.254: U3.2 37.868,33.782 37.719,33.931 37.719,35.264 38.094,35.639 40.688,35.639 46.228,30.099 63.5,30.099 68.471,35.07 68.471,43.035 65.024,46.482 U1.34
VBAT: C7.2 C19.2 C20.2 J4.1 R5.2 U4.2 | length 4.8
  Top Layer w0.5: C7.2 C7.2@32.512,12.888
  Top Layer w0.8: C7.2@32.512,12.888 U4.2
VIN: C21.1 C22.1 D1.A J2.A4 J2.B4 U3.16 | length 66.7
  Top Layer w0.4: 69.879,4.953 70.26,5.334 70.993,5.334 ; J2.A4 70.852,7.195 70.852,6.585 71.12,6.317 71.12,5.461 70.993,5.334 ; J2.B4 75.452,7.195 75.452,6.701 75.402,6.651 75.402,6.535 75.367,6.5 75.367,6.307 74.394,5.334 70.993,5.334
  Top Layer w0.7: v2(36.957,30.988) 46.355,21.59 61.849,21.59 65.278,18.161 65.278,8.03 64.868,7.62 64.023,7.62 D1.A@63.134,6.731 ; D1.A 65.532,6.731 67.31,4.953 69.879,4.953
  Bottom Layer w0.7: v2(34.163,29.972) 35.179,30.988 v2(36.957,30.988)
pads on no net: J1.01 J1.1 J1.02 J1.03 J1.04 J1.6 J2. J2.A8 J2.B8 J4.2 J4.M1 J4.M2 SW1.6 SW1.7 SW2.2 SW2.3 SW3.2 SW3.3 U1.4 U1.5 U1.6 U1.7 U1.11 U1.12 U1.14 U1.16 U1.17 U1.18 U1.19 U1.20 U1.21 U1.22 U1.23 U1.27 U1.28 U1.32 U1.33 U1.36 U2.4 U3.7 U3.8 U3.9 U3.10 U3.11 U3.12 U3.15

## Polygon pours and split planes (outlines as drawn)
VIN on Top Layer "VIN_L01_P028" (solid, pour order 28): 32.004,33.401 32.004,31.623 29.591,31.623 29.591,26.797 33.147,26.797 33.147,28.702 35.052,28.702 35.052,31.242 34.544,31.242 34.544,33.401
NetC12_2 on Top Layer "NETC12_2_L01_P027" (solid, pour order 27): 40.005,23.876 40.005,20.447 42.545,20.447 42.545,15.494 40.767,15.494 40.767,5.08 44.577,5.08 44.577,1.905 47.879,1.905 47.879,8.509 50.292,8.509 50.292,12.827 46.863,12.827 46.863,15.494 44.577,15.494 44.577,21.717 42.799,23.876
3V3 on Top Layer "3V3_L01_P022" (solid, pour order 22): 64.516,13.015 64.516,15.113 55.753,15.113 55.753,17.272 47.498,17.272 47.498,13.015
5V0 on Top Layer "5V0_L01_P025" (solid, pour order 25): 50.8,12.922 50.8,8.382 53.594,8.382 53.594,10.287 64.516,10.287 64.516,12.922
5V0 on Top Layer "5V0_L01_P026" (solid, pour order 26): 58.281,12.395 58.281,5.334 60.833,5.334 60.833,12.446 60.96,12.446
GND on Top Layer "GND_L01_P004" (solid, remove dead copper, pour order 4): 0.06,59.144 0.06,-0.038 117.027,-0.038 117.027,59.144
3V3 on Top Layer "3V3_L01_P023" (solid, pour order 23): 98.552,14.859 89.027,14.859 89.027,10.287 98.552,10.287
NetJ3_2 on Top Layer "NETJ3_2_L01_P018" (solid, pour order 18): 13.335,6.858 13.335,0.127 31.877,0.127 31.877,6.858 31.75,6.858
NetC11_2 on Top Layer "NETC11_2_L01_P017" (solid, pour order 17): 33.909,15.453 33.909,5.293 40.767,5.293 40.767,15.453 39.624,15.453
VBAT on Top Layer "VBAT_L01_P016" (solid, pour order 16): 21.971,0.889 24.13,0.889 24.13,11.938 33.481,11.938 33.481,15.494 32.004,15.494 27.432,15.494 27.432,19.177 21.971,19.177
GND on Bottom Layer "GND_L02_P001" (solid, remove dead copper, pour order 1): 0,59.182 0,0 116.967,0 116.967,59.182

## Keep-outs
Keep-Out Layer:
  rectangle: 33.655,52.705 75.655,59.205
  lines w0.2: 0,0 116.967,0 116.967,59.182 0,59.182 0,0

## Silkscreen, mask and mechanical layers (free items; w line width, h text height)
Top Overlay:
  text "BOOT" at 104.775,50.927 h1.52
  text "Reset" at 104.14,8.255 h1.52
  text "ON" at 104.648,1.778 h1.52

## Text inside footprints (layer, text, board x,y; h text height)
J2: Mechanical 13 "PCB EDGE" at 78.552,0.04 h0.41
U1: Mechanical 13 "ANTENNA" at 49.127,55.302 h1.78